# Altium PCB PCB-Shield_v2.PcbDoc
Units mil, origin at the board's own origin, x right, y up, seen from the top; angles counter-clockwise.
Board outline 3400 x 2200 mil, 2 copper layers (Top Layer, Bottom Layer); 28 components, 39 nets, 245 pads, 46 vias.
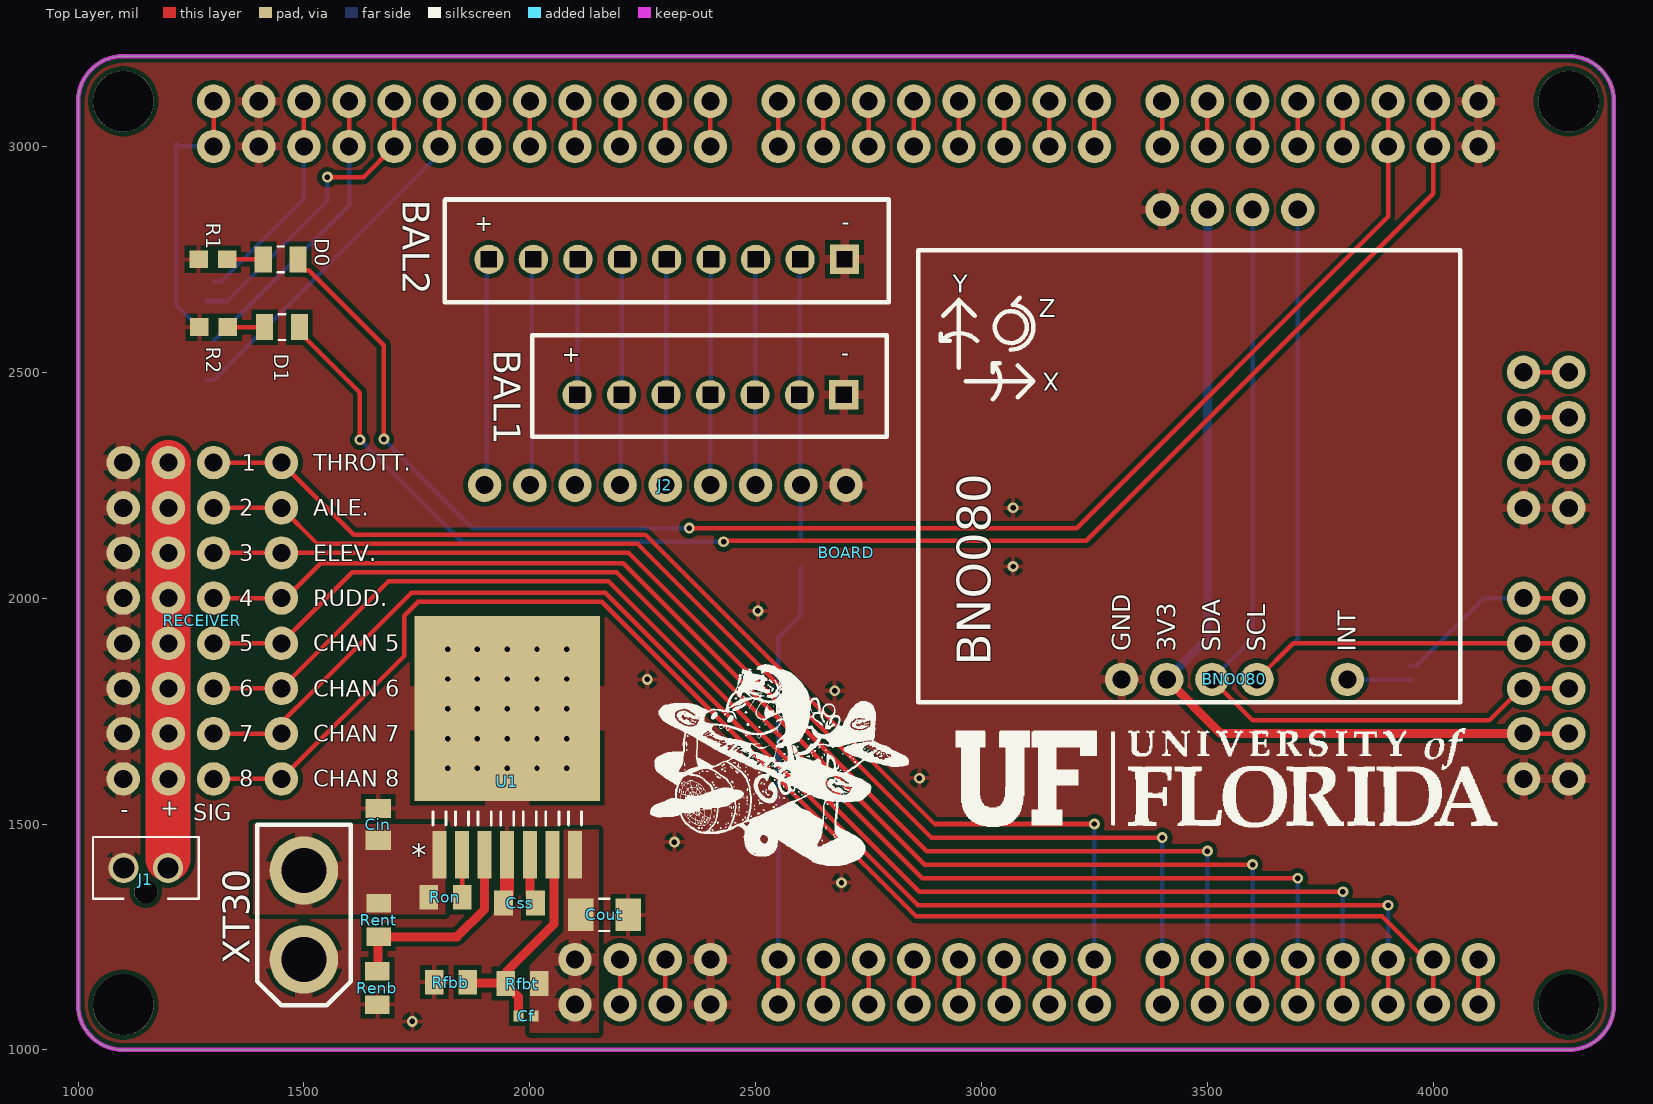
[diagram p0: Top Layer view]
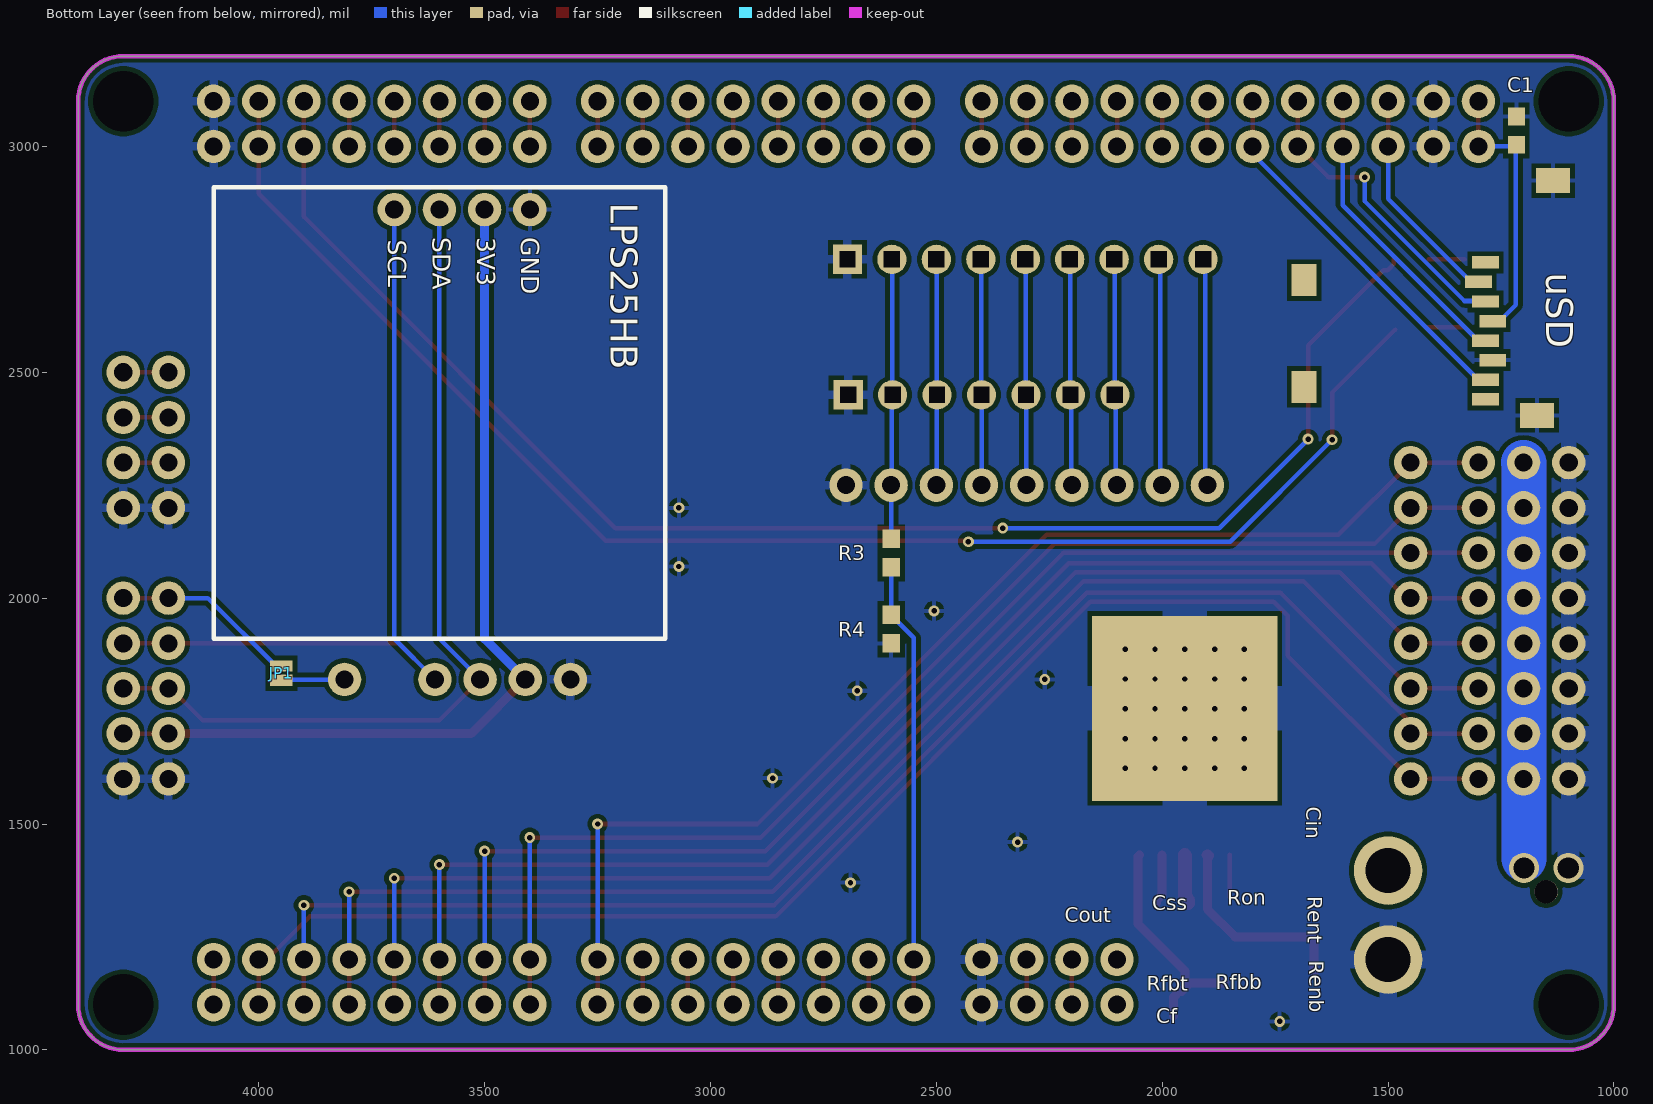
[diagram p1: Bottom Layer view, seen from below]

## Layer stack, top to bottom
Top Solder: solder mask 0.4, Solder Resist, Dk 3.5
Top Layer: signal copper 1.4
Dielectric 1: dielectric 12.6, FR-4, Dk 4.8
Bottom Layer: signal copper 1.4
Bottom Solder: solder mask 0.4, Solder Resist, Dk 3.5

## Board outline
1100,1000 cw(c1100,1100) 1000,1100 1000,3100 cw(c1100,3100) 1100,3200 4300,3200 cw(c4300,3100) 4400,3100 4400,1100 cw(c4300,1100) 4300,1000

## Design rules (kind name [scope] priority, off if disabled: settings)
Clearance [All] p1: gap=10 ignorepadtopadclearanceinfootprint=FALSE except(0: Arc-Hole Track-Hole SMDPad-Hole THPad-Hole Via-Hole Fill-Hole Poly-Hole Region-Hole Text-Hole; 5: SMDPad-SMDPad; 8: Arc-SMDPad Track-SMDPad; 12: Arc-THPad Track-THPad)
HoleSize [All] p1: absolutevalues=TRUE maxlimit=135 minlimit=1 maxpercent=80.000 minpercent=20.000
MinimumSolderMaskSliver [All] p1: minsoldermaskwidth=8
PolygonConnect [All] p1: connectstyle=Relief reliefconductorwidth=10 reliefentries=4 polygonreliefangle="90 Angle" airgapwidth=10
RoutingVias [All] p1: holewidth=28 width=50 viastyle="Through Hole" minholewidth=28 minwidth=50 maxholewidth=28 maxwidth=50
SilkToSilkClearance [All] p1: silktosilkclearance=6
SilkToSolderMaskClearance [IsPad] p1: minsilkscreentomaskgap=6 clearancetoexposedcopper=TRUE
SolderMaskExpansion [All] p1: expansion=4 istentingtop=FALSE
Width [All] p1: maxlimit=100 minlimit=5 preferedwidth=10 minimp=50.000000 maximp=50.000000 favimp=50.000000
26 further rules are at their usual default settings.

## Components (designator, comment, footprint, x,y, rotation, side; value= is the part's Value field where it differs from the comment)
BAL1 "6s_BALANCE_CONN" B7B-XH-A 2695.28,2450 r180 top
BAL2 "8s_BALANCE_CONN" B9B-XH-A 2696.85,2750 r180 top
BNO080 "BNO080" BNO080 3310,1820 r0 top
BOARD "SHIELD" SHIELD 2100,1200 r0 top locked
C1 "Cap (0603)" "CAPC 0603" 1216,3035 r90 bottom value=100nF
Cf "Cap (0402)" "CAPC 0402" 1992.01,1075 r180 top value=1nF
Cin "Cap (0805)" "CAPC 0805"#1 1664.5,1499.16 r90 top value=10uF
Cout "Cap (1206)" "CAPC 1206" 2165.08,1298.82 r0 top value=100uF
Css "Cap (0805)" "CAPC 0805"#2 1977.26,1325 r180 top value=47nF
D0 "LED (0805)" "LED 0805" 1448.5,2750 r180 top
D1 "LED (0805)" "LED 0805" 1451.5,2600 r180 top
J1 "SERVO_PWR_CONN" 1053091102 1150.79,1402.76 r0 top locked
J2 "Alarm" 1X09_NO_SILK 2700,2250 r180 top
JP1 "Normally open jumper    This jumper has two pads in close proximity to each other. Apply solder to close the connection.   Round pads are easier to solder for beginners, but are a lot larger.   SparkFun Product that uses the round pads:  SparkFun EL Sequencer" SMT-JUMPER_2_NO_SILK 3950,1834 r90 bottom
LPS25HB "LPS25HB" LPS25HB 3400,2860 r0 bottom
R1 "Res (0603)" "RES 0603" 1298.5,2750 r180 top value=65
R2 "Res (0603)" "RES 0603" 1300,2600 r180 top value=65
R3 "Res (0603)" "RES 0603" 2600,2100 r270 bottom value=10k
R4 "Res (0603)" "RES 0603" 2600,1931.5 r270 bottom value=10k
RECEIVER "8_CHAN_SERVO" 8_CHAN_SERVO 1100,1600 r0 top locked
Renb "Res (0805)" "RES 0805"#1 1662.5,1137.01 r270 top value=6.98kOhms
Rent "Res (0805)" "RES 0805"#1 1665.28,1287.15 r270 top value=34kOhms
Rfbb "Res (0805)" "RES 0805"#1 1825.49,1150 r180 top value=1.07kOhms
Rfbt "Res (0805)" "RES 0805"#1 1983.7,1146.89 r180 top value=5.62kOhm
Ron "Res (0805)" "RES 0805"#2 1812.99,1337.5 r0 top value=78.7kOhms
U1 "LMZ12002TZ-ADJ/NOPB" LMZ12002 1950,1750 r0 top locked
uSD "Micro-SD / Transflash card holder with SPI pinout   For the 3M # 2908-05WB-MG and/or 4UCON #19656 push-push type" MICROSD 1703.15,2388.98 r90 bottom locked
XT30 "XT30_MALE" XT30_MALE 1500,1397 r270 top locked

## Footprints (in the part's own frame and the unit in brackets; to place one, negate y for a bottom-side part, rotate by r counter-clockwise, add the part's x,y. Pads: shape width x height; smd on the part's side, far side on the other; paste and mask are expansions set on the pad)
1X09_NO_SILK [mil]
  round 74 hole 40: 1(0,0) 2(100,0) 3(200,0) 4(300,0) 5(400,0) 6(500,0) 7(600,0) 8(700,0) 9(800,0)
  body extent -60,-49 860,49, height 197
8_CHAN_SERVO [mil]
  round 74 hole 40: 1(0,0) 1(0,100) 1(0,200) 1(0,300) 1(0,400) 1(0,500) 1(0,600) 1(0,700) 2(100,0) 2(100,100) 2(100,200) 2(100,300) 2(100,400) 2(100,500) 2(100,600) 2(100,700) 3(200,700) 3(350,700) 4(200,600) 4(350,600) 5(200,500) 5(350,500) 6(200,400) 6(350,400) 7(200,300) 7(350,300) 8(200,200) 8(350,200) 9(200,100) 9(350,100) 10(200,0) 10(350,0)
  body extent -474,-50 399,750, height 415
1053091102 [mm] "Manufac. No. 1053091102"
  round 1.7 hole 1.2 mask+0.051: 1(-1.27,0) 2(1.23,0)
  round 1.3 hole 1.3 unplated mask+0.051: ""(-0.02,-1.34)
  silkscreen extent -2.99,-1.74 2.95,1.74, body extent -2.97,-4.6 2.97,1.74, height 10.56
B7B-XH-A [mil] "6s balance lead connector"
  rect 64.75x64.75 hole 35 square mask+4: 1(0,0)
  round 64.75 hole 35 square: 2(98.43,0) 3(196.85,0) 4(295.28,0) 5(393.7,0) 6(492.13,0) 7(590.55,0)
  silkscreen extent -95,-132 690,93, body extent -95,-133 688,93, height 276
B9B-XH-A [mil]
  rect 64.75x64.75 hole 35 square: 1(0,0)
  round 64.75 hole 35 square: 2(98.42,0) 3(196.85,0) 4(295.28,0) 5(393.7,0) 6(492.12,0) 7(590.55,0) 8(688.97,0) 9(787.4,0)
  silkscreen extent -98,-132 885,95, body extent -96,-133 884,94, height 276
BNO080 [mil]
  round 74 hole 40: 1(0,0) 2(100,0) 3(200,0) 4(300,0) 5(500,0)
  silkscreen extent -450,-50 750,950
"CAPC 0402" [mm]
  rect 0.54x0.6 smd mask+0.051: 1(-0.432,0) 2(0.432,0)
  body extent -0.5,-0.27 0.5,0.28, height 0.5
"CAPC 0603" [mm] "Chip Capacitor, 2-Leads, Body 1.60x0.80mm, IPC Medium Density"
  rect 1x0.95 smd: 1(-0.8,0) 2(0.8,0)
  body extent -0.88,-0.48 0.87,0.48, height 0.8
"CAPC 0805"#1 [mm]
  rect 1.08x1.42 smd: 1(-0.895,0) 2(0.895,0)
  body extent -1.01,-0.7 0.99,0.7
"CAPC 0805"#2 [mm]
  rect 1.08x1.42 smd: 1(-0.895,0)
  rect 1.08x1.42 smd mask+0.102: 2(0.895,0)
  body extent -1.01,-0.7 0.99,0.7
"CAPC 1206" [mm]
  rect 1.44x1.82 smd: 1(-1.336,0) 2(1.336,0)
  silkscreen extent -0.29,-0.9 0.29,0.9, body extent -1.63,-0.9 1.57,0.9, height 1.59
"LED 0805" [mm]
  rect 0.96x1.47 smd: 1(-0.978,0) 2(0.978,0)
  silkscreen extent -0.18,-0.72 0.18,0.72, body extent -1,-0.62 1,0.63, height 0.7
LMZ12002 [mil]
  rect 31x105 smd: 1(-150,-318.5) 2(-100,-318.5) 3(-50,-318.5) 4(0,-318.5) 5(50,-318.5) 6(100,-318.5) 7(150,-318.5)
  rect 410x410 smd: 8(0,6) 8(0,6)
  rect 410x410 smd far side: 8(0,6)
  silkscreen extent -164,-252 164,-223, body extent -200,-348 200,194, height 186
LPS25HB [mil]
  round 74 hole 40: 1(0,0) 2(100,0) 3(200,0) 4(300,0)
  silkscreen extent -300,-50 700,950
MICROSD [mm]
  rect 0.7x1.5 smd mask+0.051: 1(9,-10.64) 2(7.9,-10.24) 3(6.8,-10.64) 4(5.7,-11.04) 5(4.6,-10.64) 6(3.5,-11.04) 7(2.4,-10.64) 8(1.3,-10.64)
  rect 1.8x1.4 smd: CD1(2,-0.44) CD2(8,-0.44)
  rect 1.4x1.9 smd: MT1(0.4,-13.54) MT2(13.6,-14.44)
  body extent -0.13,-15.32 13.97,0.13, height 1.85
"RES 0603" [mm] "Chip Resistor, 2-Leads, Body 1.60x0.80mm, IPC Medium Density"
  rect 1.05x1 smd: 1(-0.8,0) 2(0.8,0)
  body extent -0.88,-0.48 0.87,0.47, height 0.8
"RES 0805"#1 [mm]
  rect 1.04x1.38 smd: 1(-0.94,0) 2(0.94,0)
  body extent -1,-0.62 1,0.63, height 0.7
"RES 0805"#2 [mm]
  rect 1.04x1.38 smd mask+0.051: 1(-0.94,0) 2(0.94,0)
  body extent -1,-0.62 1,0.63, height 0.7
SHIELD [mil] "This part is the layout of all the through holes needed to fit the ATP carrier board"
  round 74 hole 40: 1(0,-100) 1(0,0) 2(100,-100) 2(100,0) 3(200,-100) 3(200,0) 4(300,-100) 4(300,0) 5(450,-100) 5(450,0) 6(550,-100) 6(550,0) 7(650,-100) 7(650,0) 8(750,-100) 8(750,0) 9(850,-100) 9(850,0) 10(950,-100) 10(950,0) 11(1050,-100) 11(1050,0) 12(1150,-100) 12(1150,0) 13(1300,-100) 13(1300,0) 14(1400,-100) 14(1400,0) 15(1500,-100) 15(1500,0) 16(1600,-100) 16(1600,0) 17(1700,-100) 17(1700,0) 18(1800,-100) 18(1800,0) 19(1900,-100) 19(1900,0) 20(2000,-100) 20(2000,0) 21(2100,400) 21(2200,400) 22(2100,500) 22(2200,500) 23(2100,600) 23(2200,600) 24(2100,700) 24(2200,700) 25(2100,800) 25(2200,800) 26(2100,1000) 26(2200,1000) 27(2100,1100) 27(2200,1100) 28(2100,1200) 28(2200,1200) 29(2100,1300) 29(2200,1300) 30(2000,1800) 30(2000,1900) 31(1900,1800) 31(1900,1900) 32(1800,1800) 32(1800,1900) 33(1700,1800) 33(1700,1900) 34(1600,1800) 34(1600,1900) 35(1500,1800) 35(1500,1900) 36(1400,1800) 36(1400,1900) 37(1300,1800) 37(1300,1900) 38(1150,1800) 38(1150,1900) 39(1050,1800) 39(1050,1900) 40(950,1800) 40(950,1900) 41(850,1800) 41(850,1900) 42(750,1800) 42(750,1900) 43(650,1800) 43(650,1900) 44(550,1800) 44(550,1900) 45(450,1800) 45(450,1900) 46(300,1800) 46(300,1900) 47(200,1800) 47(200,1900) 48(100,1800) 48(100,1900) 49(0,1800) 49(0,1900) 50(-100,1800) 50(-100,1900) 51(-200,1800) 51(-200,1900) 52(-300,1800) 52(-300,1900) 53(-400,1800) 53(-400,1900) 54(-500,1800) 54(-500,1900) 55(-600,1800) 55(-600,1900) 56(-700,1800) 56(-700,1900) 57(-800,1800) 57(-800,1900)
  round 135 / inner round 74 / far side round 74 hole 135 unplated: H1(-1000,-100) H1(-1000,1900) H1(2200,-100) H1(2200,1900)
  Top Layer lines w10: -800,1800 -800,1900 ; -600,1800 -600,1900 ; -500,1800 -500,1900 ; -400,1800 -400,1900 ; -300,1800 -300,1900 ; -200,1800 -200,1900 ; -100,1800 -100,1900 ; 0,1800 0,1900 ; 100,-100 100,0 ; 100,1800 100,1900 ; 200,-100 200,0 ; 200,1800 200,1900 ; 300,1800 300,1900 ; 450,-100 450,0 ; 450,1800 450,1900 ; 550,-100 550,0 ; 550,1800 550,1900 ; 650,-100 650,0 ; 650,1800 650,1900 ; 750,-100 750,0 ; 750,1800 750,1900 ; 850,-100 850,0 ; 850,1800 850,1900 ; 950,-100 950,0 ; 950,1800 950,1900 ; 1050,-100 1050,0 ; 1050,1800 1050,1900 ; 1150,-100 1150,0 ; 1150,1800 1150,1900 ; 1300,-100 1300,0 ; 1300,1800 1300,1900 ; 1400,-100 1400,0 ; 1400,1800 1400,1900 ; 1500,-100 1500,0 ; 1500,1800 1500,1900 ; 1600,-100 1600,0 ; 1600,1800 1600,1900 ; 1700,-100 1700,0 ; 1700,1800 1700,1900 ; 1800,-100 1800,0 ; 1800,1800 1800,1900 ; 1900,-100 1900,0 ; 1900,1800 1900,1900 ; 2000,-100 2000,0 ; 2100,500 2200,500 ; 2100,600 2200,600 ; 2100,700 2200,700 ; 2100,800 2200,800 ; 2100,1100 2200,1100 ; 2100,1200 2200,1200 ; 2100,1300 2200,1300
  Keep-Out Layer lines w10: -1100,-100 ccw(c-1000,-100) -1000,-200 2200,-200 ccw(c2200,-100) 2300,-100 2300,1900 ccw(c2200,1900) 2200,2000 -1000,2000 ccw(c-1000,1900) -1100,1900 -1100,-100
  body extent -860,-49 2149,1849, height 197
SMT-JUMPER_2_NO_SILK [mil]
  rect 25x50 smd paste+0: 1(-16,0) 2(16,0)
XT30_MALE [mil]
  round 151.7 hole 100: 1(0,0) 2(197,0)
  silkscreen extent -102,-104 298,104, body extent -109,-105 300,104, height 496

## Part data
BNO080: "BNO080 Breakout Board"
C1: Supplier Part Number 1=1276-1000-1-ND, Supplier 1=Digi-Key
Cf: Supplier Part Number 1=8145808P, Supplier 1=RSComponents, Supplier 2=Digi-Key, Supplier Part Number 2=490-10702-1-ND
Cin Css: Supplier Part Number 1=490-10748-1-ND, Supplier 1=Digi-Key
Cout: Supplier Part Number 1=445-6007-1-ND, Supplier 1=Digi-Key
J1: "Connector Header Through Hole 2 position 0.098 (2.50mm)", Package=None, Availability="Not in stock", Check_prices=https://www.snapeda.com/parts/1053091102/Molex/view-part/2711154/?ref=eda, MF=Molex, MP=1053091102, Price=None, SnapEDA_Link=https://www.snapeda.com/parts/1053091102/Molex/view-part/2711154/?ref=snap
J2: library part CONN_09NO_SILK_FEMALE_PTH, Package=1X08_NO_SILK, DeviceName=NO_SILK_FEMALE_PTH, DeviceSetName=CONN_08, GateName_1=G$1, LibraryName=SparkFun-Connectors, PROD_ID=CONN-08438, SymbolName_1=CONN_08
JP1: library part JUMPER-SMT_2_NO_SILK, Package=SMT-JUMPER_2_NO_SILK, DeviceName=_SILK, DeviceSetName=JUMPER-SMT_2_NO, GateName_1=G$1, LibraryName=SparkFun-Jumpers, SymbolName_1=SMT-JUMPER_2_NO
LPS25HB: "LPS25HB Breakout Board"
R1 R2 R3 R4: Supplier Part Number 1=RMCF0603JT10K0CT-ND, Supplier 1=Digi-Key
Renb Rent Rfbb Rfbt Ron: Supplier Part Number 1=P6.98KCCT-ND, Supplier 1=Digi-Key, Supplier 2=Digi-Key, Supplier 3=Digi-Key, Supplier 4=Digi-Key, Supplier 5=Digi-Key, Supplier Part Number 2=P1.07KCCT-ND, Supplier Part Number 3=P5.62KCCT-ND, Supplier Part Number 4=P34.0KCCT-ND, Supplier Part Number 5=P78.7KCCT-ND
U1: "2A SIMPLE SWITCHER® Power Module with 20V Maximum Input Voltage", Manufacturer="Texas Instruments", NSC_PackageReference=TZA07A, basePN=LMZ12002, Copyright="Copyright (C) 2018 Accelerated Designs. All rights reserved", DatasheetURL=http://www.ti.com/lit/ds/symlink/lmz12002.pdf, Manufacturer_Part_Number=LMZ12002TZ-ADJ/NOPB, RefDes=RefDes, Type=DEV, Vendor="Texas Instruments"
uSD: library part MICROSD, DeviceSetName=MICROSD, GateName_1=G$1, LibraryName=adafruit, Package=MICROSD, SymbolName_1=TRANSFLASH

## Via types
v1: diameter 24, hole 12, Top Layer to Bottom Layer, 46 vias

## Nets (pads, with @x,y where several pads share a name; then routed paths per layer and width w, separated by ;. In a path a pad name is that pad's centre, name@x,y a point inside that pad or via, vN(x,y) a via of type N, cw(c..) or ccw(c..) an arc to the next point about the centre after c; other vN are vias at no path point)
1s: BAL1.2 BAL2.2 J2.2 R3.1 | length 620.5
  Bottom Layer w10: BAL2.2 2597.64,2749.21 2597.64,2450.79 BAL1.2 2598.43,2448.43 2598.43,2251.57 J2.2 R3.1
2s: BAL1.3 BAL2.3 J2.3 | length 501.3
  Bottom Layer w10: J2.3 2499.21,2250.79 2499.21,2449.21 BAL1.3 2499.21,2450.79 2499.21,2749.21 BAL2.3
3s: BAL1.4 BAL2.4 J2.4 | length 500.7
  Bottom Layer w10: J2.4 BAL1.4 2400.79,2450.79 2400.79,2749.21 BAL2.4
"3V3 S2": BNO080.2 BOARD.22 LPS25HB.2 | length 1917
  Top Layer w20: BNO080.2 3530,1700 BOARD.22@4200,1700
  Bottom Layer w20: BNO080.2 3500,1910 LPS25HB.2
"3V3 S4": BOARD.57 C1.1 uSD.4 | length 506.9
  Bottom Layer w10: C1.1 C1.1@1217.13,3002.37 ; C1.1@1217.13,3004.29 C1.1@1217.13,3002.37 ; uSD.4 1252.75,2613.39 1217.13,2649.01 C1.1@1217.13,3002.37 ; BOARD.57@1300,3000 1219.5,3000 C1.1@1217.13,3002.37
4s: BAL1.5 BAL2.5 J2.5 | length 501.3
  Bottom Layer w10: J2.5 2300.79,2250.79 2300.79,2449.21 BAL1.5 2302.36,2450.79 2302.36,2749.21 BAL2.5
5s: BAL1.6 BAL2.6 J2.6 | length 502
  Bottom Layer w10: J2.6 2201.57,2251.57 2201.57,2448.43 BAL1.6 2203.94,2450.79 2203.94,2749.21 BAL2.6
6s: BAL1.7 BAL2.7 J2.7 | length 502.6
  Bottom Layer w10: J2.7 2102.36,2252.36 2102.36,2447.64 BAL1.7 2105.51,2450.79 2105.51,2749.21 BAL2.7
7s: BAL2.8 J2.8 | length 503.3
  Bottom Layer w10: J2.8 2003.94,2253.94 2003.94,2746.06 BAL2.8
8s: BAL2.9 J2.9 | length 503.9
  Bottom Layer w10: J2.9 1904.72,2254.72 1904.72,2745.28 BAL2.9
A0: BOARD.5 R3.2 R4.1 | length 889.2
  Bottom Layer w10: BOARD.5@2550,1200 2550,1912.01 2600,1962.01 R4.1 R3.2
CIPO: BOARD.52 uSD.7 | length 735.3
  Bottom Layer w10: uSD.7 1300,2483.47 1794.58,2978.05 BOARD.52@1814.73,2978.05
COPI: BOARD.53 uSD.3 | length 589
  Top Layer w10: v1(1552,2932) 1632,2932 BOARD.53@1700,3000
  Bottom Layer w10: uSD.3 1285.33,2657.78 1330.78,2657.78 1552,2879 v1(1552,2932)
CS: BOARD.55 uSD.2 | length 392.1
  Bottom Layer w10: uSD.2 1315.75,2700 1500,2884.25 BOARD.55@1500,3000
D0: BOARD.32 D0.1 | length 3228.6
  Top Layer w10: D0.1 1487.01,2739.96 1500.91,2726.06 1510.94,2726.06 1677,2560.01 v1(1677,2352) ; v1(2353,2155) 3211,2155 3900,2844 BOARD.32@3900,3000
  Bottom Layer w10: v1(1677,2352) 1874,2155 v1(2353,2155)
D1: BOARD.31 D1.1 | length 3195
  Top Layer w10: D1.1@1484.48,2594.48 1624,2454.96 v1(1624,2350.63) ; v1(2429,2125) 2431,2127 3232,2127 4000,2895 BOARD.31@4000,3000
  Bottom Layer w10: v1(1624,2350.63) 1849.63,2125 v1(2429,2125)
G1: BOARD.12 RECEIVER.3 | length 2581.4
  Top Layer w10: RECEIVER.3@1300,2300 1450,2300 1610,2140 2256,2140 2896,1500 v1(3250,1500)
  Bottom Layer w10: BOARD.12@3250,1200 v1(3250,1500)
G2: BOARD.13 RECEIVER.4 | length 2672.4
  Top Layer w10: RECEIVER.4@1300,2200 1450,2200 1530,2120 2239,2120 2889,1470 v1(3400,1470)
  Bottom Layer w10: BOARD.13@3400,1200 v1(3400,1470)
G3: BOARD.14 RECEIVER.5 | length 2713.4
  Top Layer w10: RECEIVER.5@1300,2100 1450,2100 2219,2100 2879,1440 v1(3500,1440)
  Bottom Layer w10: BOARD.14@3500,1200 v1(3500,1440)
G4: BOARD.15 RECEIVER.6 | length 2818.2
  Top Layer w10: RECEIVER.6@1300,2000 1450,2000 1460,2000 1537,2077 2207,2077 2874,1410 v1(3600,1410)
  Bottom Layer w10: BOARD.15@3600,1200 v1(3600,1410)
G5: BOARD.16 RECEIVER.7 | length 2925.5
  Top Layer w10: RECEIVER.7@1300,1900 1450,1900 1607,2057 2192,2057 2869,1380 v1(3700,1380)
  Bottom Layer w10: BOARD.16@3700,1200 v1(3700,1380)
G6: BOARD.17 RECEIVER.8 | length 3032.7
  Top Layer w10: RECEIVER.8@1300,1800 1450,1800 1687,2037 2175,2037 2862,1350 v1(3800,1350)
  Bottom Layer w10: BOARD.17@3800,1200 v1(3800,1350)
G7: BOARD.18 RECEIVER.9 | length 3149.9
  Top Layer w10: RECEIVER.9@1300,1700 1450,1700 1450,1724 1484.26,1758.26 ccw(c1450,1800) 1491.74,1765.74 1738,2012 2167.28,2012 2859.28,1320 v1(3900,1320)
  Bottom Layer w10: BOARD.18@3900,1200 v1(3900,1320)
G8: BOARD.19 RECEIVER.10 | length 3242.6
  Top Layer w10: RECEIVER.10@1300,1600 1450,1600 1722,1872 1722,1961 1753,1992 2159,1992 2855,1296 3886.68,1296 3982.68,1200 BOARD.19@4000,1200
GND: BAL1.1 BAL2.1 BNO080.1 BOARD.4 BOARD.21 BOARD.26 BOARD.30 BOARD.56 C1.2 Cin.2 Cout.2 Css.2 J1.1 J2.1 LPS25HB.1 R1.2 R2.2 R4.2 RECEIVER.1 Renb.2 Rfbb.2 U1.4 U1.8 uSD.6 uSD.MT1 uSD.MT2 XT30.2 | length 111.8
  Top Layer w30: J1.1@1099.41,1401.38 J1.1 ; Css.2 1942.03,1331.69 1949.5,1339.17 1949.5,1431 U1.4
  other v1: 1739.86,1062.94 2690,1370 2320,1460 2862.46,1601.35 1818,1623 1884,1623 1950,1623 2016,1623 2082,1623 1818,1689 1884,1689 1950,1689 2016,1689 2082,1689 1818,1755 1884,1755 1950,1755 2016,1755 2082,1755 2675,1795 2260,1820 1818,1821 1884,1821 1950,1821 2016,1821 2082,1821 1818,1887 1884,1887 1950,1887 2016,1887 2082,1887 2505,1971.74 3070,2070 3070,2200
"I2C INT": BOARD.25 JP1.2 | length 312.1
  Bottom Layer w10: JP1.2 3962.5,1850 4112.5,2000 BOARD.25@4200,2000
NetBNO080_5: BNO080.5 JP1.1 | length 140.8
  Bottom Layer w10: BNO080.5 3811,1819 3949,1819 JP1.1
NetCf_2: Cf.2 Rfbb.1 Rfbt.2 U1.6 | length 499.4
  Top Layer w20: Rfbb.1 1864.06,1148.44 1945.14,1148.44 1950,1153.31 1950,1175 2053.76,1278.76 2053.76,1427.74 U1.6 ; Rfbt.2 1946.69,1140.19 1957.16,1129.72 1962.09,1129.72 1975,1116.81 Cf.2
NetCss_1: Css.1 U1.5 | length 111.7
  Top Layer w20: U1.5 2000,1344.19 2012.5,1331.69 Css.1
NetD0_2: D0.2 R1.1 | length 80
  Top Layer w10: R1.1 D0.2
NetD1_2: D1.2 R2.1 | length 81.5
  Top Layer w10: R2.1 D1.2
NetRenb_1: Renb.1 Rent.2 U1.3 | length 459.8
  Top Layer w20: Renb.1 1663.89,1175.41 1663.89,1248.75 Rent.2 1838.56,1250.14 1900,1311.58 U1.3
  Top Layer w25: U1.3@1898.27,1429.77 U1.3
NetRon_2: Ron.2 U1.2 | length 94
  Top Layer w10: Ron.2 U1.2
SCK: BOARD.54 uSD.5 | length 554.2
  Bottom Layer w10: uSD.5@1300,2570.08 1600,2870.08 BOARD.54@1600,3000
SCL: BNO080.4 BOARD.24 LPS25HB.4 | length 1700.4
  Top Layer w10: BNO080.4 3690,1900 BOARD.24@4200,1900
  Bottom Layer w10: BNO080.4 3700,1910 LPS25HB.4
SDA: BNO080.3 BOARD.23 LPS25HB.3 | length 1833.6
  Top Layer w10: BNO080.3 3600,1730 4124.46,1730 4194.46,1800 BOARD.23@4200,1800
  Bottom Layer w10: BNO080.3 3600,1910 LPS25HB.3
"Servo PWR": J1.2 RECEIVER.2 | length 1788.2
  Top Layer w10: J1.2@1199.61,1403.15 1223.23,1426.77
  Top Layer w100: J1.2@1199.21,1422.82 1199.21,1600 1199.21,2299.21 RECEIVER.2@1200,2300
  Bottom Layer w100: J1.2@1199.21,1423 1199.21,1700 1199.21,2000 1199.21,2100 1199.21,2299.21 RECEIVER.2@1200,2300
"VIN BOARD": BOARD.1 Cf.1 Cout.1 Rfbt.1 U1.7
"VIN PWR MOD": Cin.1 Rent.1 Ron.1 U1.1 XT30.1
pads on no net: BOARD.2 BOARD.3 BOARD.6 BOARD.7 BOARD.8 BOARD.9 BOARD.10 BOARD.11 BOARD.20 BOARD.27 BOARD.28 BOARD.29 BOARD.33 BOARD.34 BOARD.35 BOARD.36 BOARD.37 BOARD.38 BOARD.39 BOARD.40 BOARD.41 BOARD.42 BOARD.43 BOARD.44 BOARD.45 BOARD.46 BOARD.47 BOARD.48 BOARD.49 BOARD.50 BOARD.51 BOARD.H1 J1. uSD.1 uSD.8 uSD.CD1 uSD.CD2

## Polygon pours and split planes (outlines as drawn)
"VIN BOARD" on Top Layer "VIN_BOARD_L01_P007" (solid, pour order 7): 2000,1037.5 2152.15,1037.5 2152.15,1487.5 2075,1487.5 2075,1262.5 2000,1187.5
GND on Top Layer "GND_L01_P009" (solid, remove dead copper, pour order 9): 1000,3200 1000,1000 4400,1000 4400,3200
"VIN PWR MOD" on Top Layer "VIN_PWR_MOD_L01_P004" (solid, remove dead copper, pour order 4): 1812.5,1500 1387.5,1500 1387.5,1300 1812.5,1300
GND on Bottom Layer "GND_L02_P010" (solid, remove dead copper, pour order 10): 1000,3200 1000,1000 4400,1000 4400,3200

## Keep-outs
Keep-Out Layer:
  the board outline again, w10

## Silkscreen, mask and mechanical layers (free items; w line width, h text height)
Top Overlay:
  drawing of 174 lines, arcs and shapes, not listed

## Text inside footprints (layer, text, board x,y; h text height)
BAL1: Top Overlay "+" at 2112.27,2552.99 h36 r180; Top Overlay "-" at 2707.27,2552.99 h36 r180
BAL2: Top Overlay "-" at 2708.85,2842.99 h36 r180; Top Overlay "+" at 1918.85,2842.99 h36 r180
BNO080: Top Overlay "GND" at 3329.08,1881.89 h40 r90; Top Overlay "3V3" at 3428.89,1881.5 h40 r90; Top Overlay "SDA" at 3528.69,1881.5 h40 r90; Top Overlay "SCL" at 3628.5,1881.5 h40 r90; Top Overlay "INT" at 3828.5,1881.5 h40 r90; Top Overlay "X" at 3173.5,2498.5 h40 r180; Top Overlay "Y" at 2936.5,2676.5 h40; Top Overlay "Z" at 3126.5,2621.5 h40
LPS25HB: Bottom Overlay "SCL" at 3713.5,2793.5 h40 r90; Bottom Overlay "SDA" at 3615.17,2798.5 h40 r90; Bottom Overlay "3V3" at 3516.83,2798.5 h40 r90; Bottom Overlay "GND" at 3418.5,2798.5 h40 r90
RECEIVER: Top Overlay "+" at 1217.99,1513 h36 r90; Top Overlay "-" at 1112,1542.99 h36 r180; Top Overlay "SIG" at 1255.01,1507.01 h36; Top Overlay "1" at 1362.75,2282.01 h36; Top Overlay "2" at 1356.75,2182.01 h36; Top Overlay "3" at 1356.75,2082.01 h36; Top Overlay "4" at 1356.75,1982.01 h36; Top Overlay "5" at 1356.75,1882.01 h36; Top Overlay "6" at 1356.75,1782.01 h36; Top Overlay "7" at 1356.75,1682.01 h36; Top Overlay "8" at 1356.75,1582.01 h36; Top Overlay "THROTT." at 1520.5,2282.01 h36; Top Overlay "AILE." at 1520.5,2182.01 h36; Top Overlay "ELEV." at 1520.5,2082.01 h36; Top Overlay "RUDD." at 1520.5,1982.01 h36; Top Overlay "CHAN 5" at 1520.5,1882.01 h36; Top Overlay "CHAN 6" at 1520.5,1782.01 h36; Top Overlay "CHAN 7" at 1520.5,1682.01 h36; Top Overlay "CHAN 8" at 1520.5,1582.01 h36
U1: Top Overlay "*" at 1737.5,1406.5 h50; Mechanical 13 "*" at 1737.5,1406.5 h50